# Altium PCB PCB_v4.PcbDoc
Units mm, origin at the board's own origin, x right, y up, seen from the top; angles counter-clockwise.
Board outline 48.97 x 20 mm, 2 copper layers (Top Layer, Bottom Layer); 22 components, 30 nets, 127 pads, 58 vias.
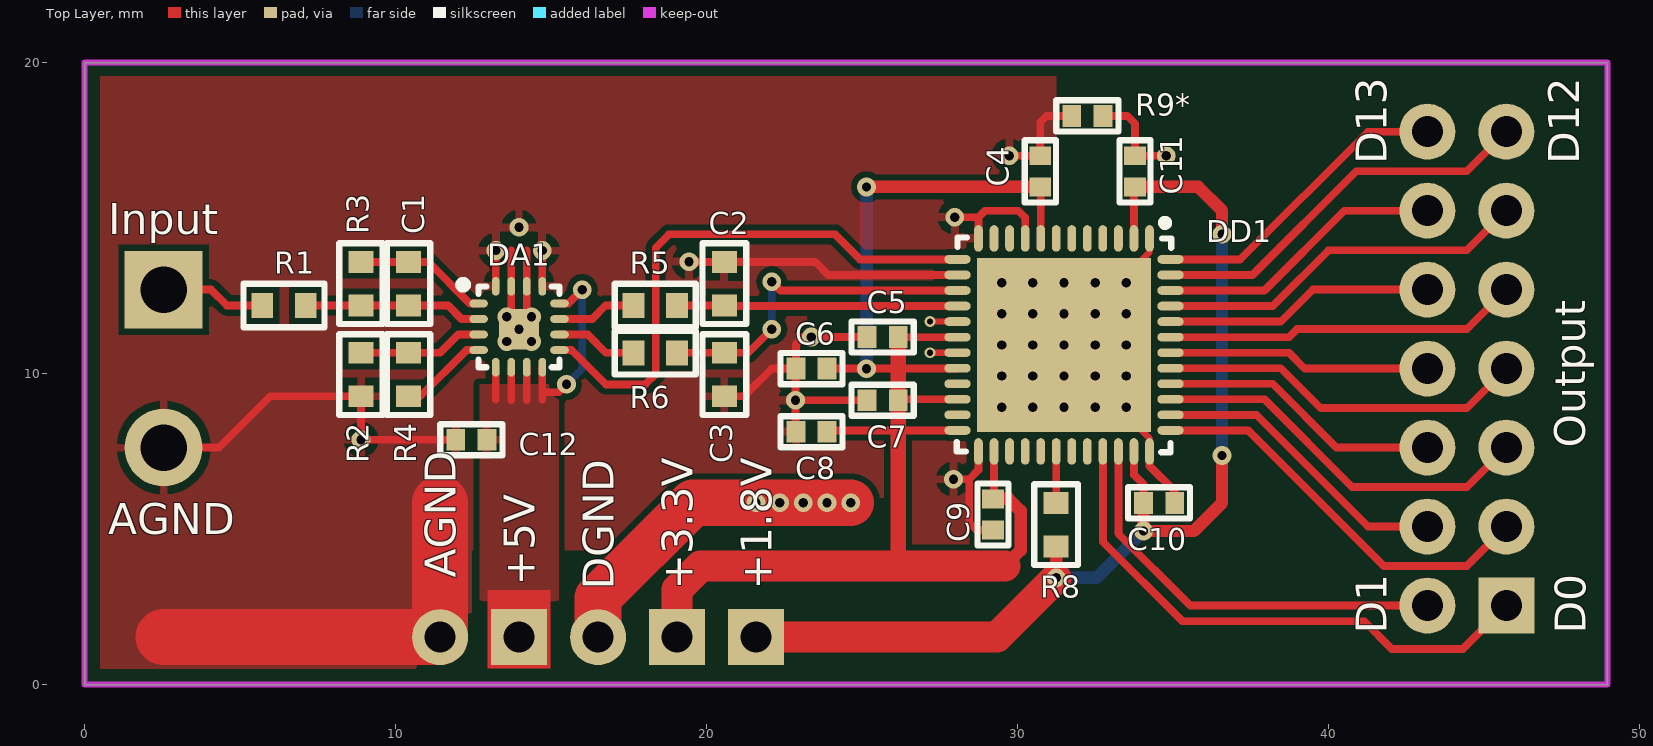
[diagram p0: Top Layer view]
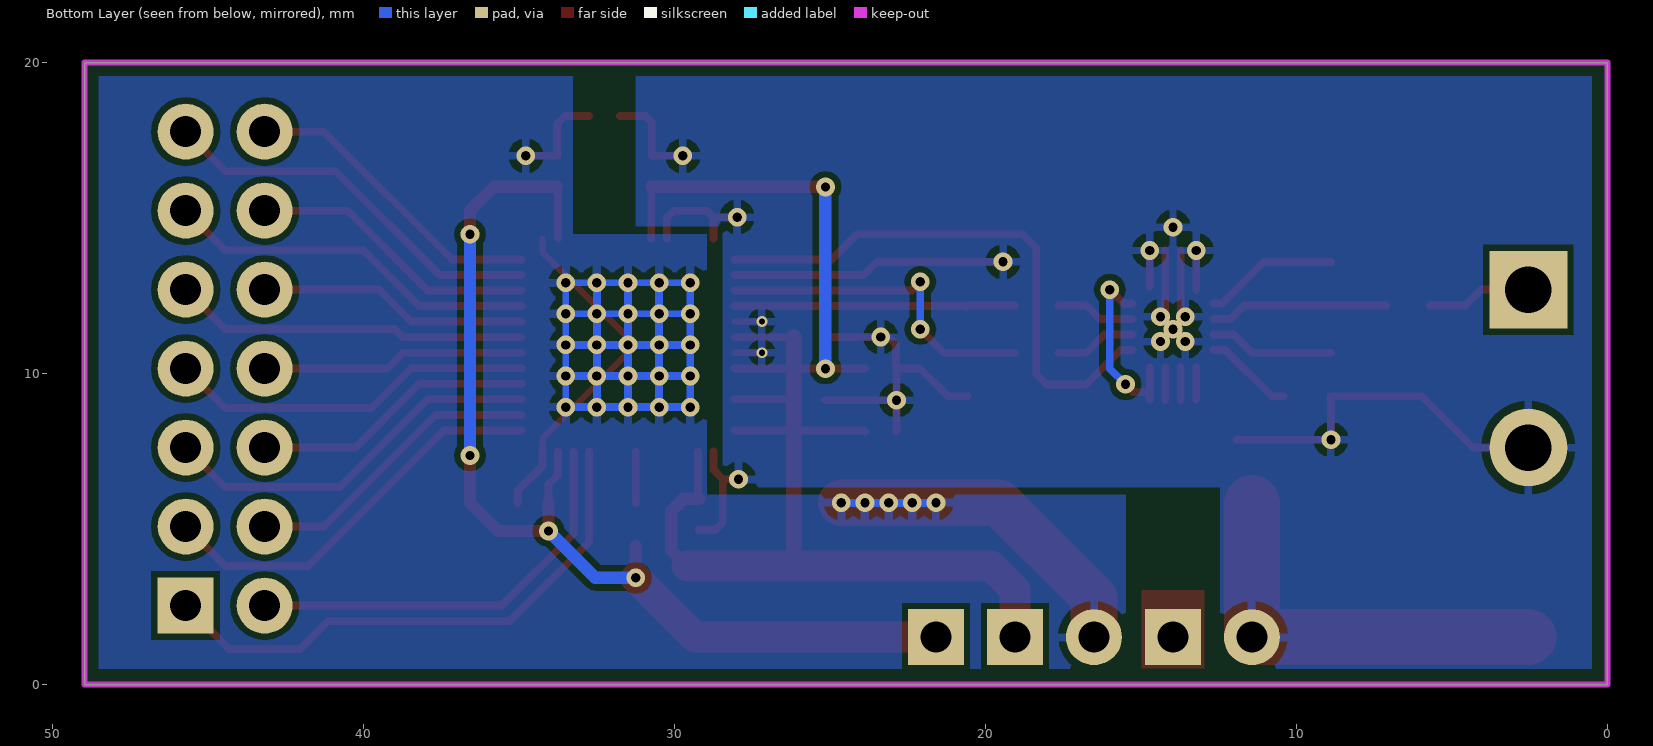
[diagram p1: Bottom Layer view, seen from below]

## Layer stack, top to bottom
Top Solder: solder mask 0.0102, Solder Resist, Dk 3.5
Top Layer: signal copper 0.0356
Dielectric 1: dielectric 0.32, FR-4, Dk 4.8
Bottom Layer: signal copper 0.0356
Bottom Solder: solder mask 0.0102, Solder Resist, Dk 3.5

## Board outline
0,0 0,20 48.97,20 48.97,0

## Design rules (kind name [scope] priority, off if disabled: settings)
Clearance [All] p1: gap=0.2 ignorepadtopadclearanceinfootprint=FALSE
ComponentClearance [All] p1 off: gap=0.254 collisioncheckmode=3 verticalgap=0.254 showdistances=FALSE
HoleSize [All] p1 off: absolutevalues=TRUE maxlimit=2.54 minlimit=0.025 maxpercent=80.000 minpercent=20.000
HoleToHoleClearance [All] p1 off: gap=0.254 allowstackedmicrovias=TRUE
LayerPairs [All] p1 off: enforce=TRUE
MinimumSolderMaskSliver [All] p1 off: minsoldermaskwidth=0.254
NetAntennae [All] p1 off: netantennaetolerance=0
PolygonConnect [All] p1: connectstyle=Relief reliefconductorwidth=0.254 reliefentries=4 polygonreliefangle="90 Angle" airgapwidth=0.254
RoutingVias [All] p1: holewidth=0.3 width=0.6 viastyle="Through Hole" minholewidth=0.1 minwidth=0.1 maxholewidth=0.711 maxwidth=1.27
SilkToSilkClearance [All] p1 off: silktosilkclearance=0.254
SilkToSolderMaskClearance [IsPad] p1 off: minsilkscreentomaskgap=0.254 clearancetoexposedcopper=TRUE
SolderMaskExpansion [All] p1: expansion=0.102
Width [All] p1: maxlimit=10 minlimit=0.1 preferedwidth=0.254
22 further rules are at their usual default settings.

## Components (designator, comment, footprint, x,y, rotation, side; value= is the part's Value field where it differs from the comment)
C1 "1 мкФ" RC0603 10.414,12.192 r180 top
C2 "56 пФ" RC0603 20.574,12.192 r180 top
C3 "56 пФ" RC0603 20.574,9.268 r180 top
C4 "0,1 мкФ" RC0402 30.734,16.002 r90 top (schematic designator С4)
C5 "0,1 мкФ" RC0402 26.162,11.176 r180 top
C6 "0,1 мкФ" RC0402 23.876,10.16 r180 top
C7 "0,1 мкФ" RC0402 26.162,9.144 r180 top
C8 "0,1 мкФ" RC0402 23.876,8.128 r180 top
C9 "0,1 мкФ" RC0402 29.21,5.969 r270 top
C10 "0,1 мкФ" RC0402 34.052,5.842 r0 top
C11 "0,1 мкФ" RC0402 33.782,16.002 r90 top
C12 "0,1 мкФ" RC0402 12.938,7.874 r180 top
DA1 "ADA4932-1" QFN16 12.67,12.255 r0 top
DD1 "ADS61B49" QFN48 34.246,14.347 r270 top
R1 "500 Ом" RC0603 5.712,12.192 r90 top
R2 "500 Ом" RC0603 8.89,10.668 r0 top
R3 "1 кОм" RC0603 8.89,12.192 r180 top
R4 "1 кОм" RC0603 10.414,10.668 r0 top
R5 "33" RC0603 17.65,12.192 r90 top
R6 "33" RC0603 17.65,10.668 r90 top
R8 "10 кОм" RC0603 31.242,5.842 r0 top
R9* "0 Ом" RC0402 31.75,18.288 r0 top

## Footprints (in the part's own frame and the unit in brackets; to place one, negate y for a bottom-side part, rotate by r counter-clockwise, add the part's x,y. Pads: shape width x height; smd on the part's side, far side on the other; paste and mask are expansions set on the pad)
QFN16 [mm]
  oval 0.6x0.25 smd mask+0.07: 1(0,0) 2(0,-0.5) 3(0,-1) 4(0,-1.5) 9(2.6,-1.5) 10(2.6,-1) 11(2.6,-0.5) 12(2.6,0)
  oval 0.25x0.6 smd mask+0.07: 5(0.55,-2.05) 6(1.05,-2.05) 7(1.55,-2.05) 8(2.05,-2.05) 13(2.05,0.55) 14(1.55,0.55) 15(1.05,0.55) 16(0.55,0.55)
  rrect50% 1.3x1.3 smd mask+0.07: 17(1.3,-0.825)
  silkscreen extent -0.63,-2.05 2.6,0.73
QFN48 [mm] "Корпус для ADS61B49"
  oval 0.85x0.28 smd mask+0.07: 1(0,0) 2(0,-0.5) 3(0,-1) 4(0,-1.5) 5(0,-2) 6(0,-2.5) 7(0,-3) 8(0,-3.5) 9(0,-4) 10(0,-4.5) 11(0,-5) 12(0,-5.5) 25(6.85,-5.5) 26(6.85,-5) 27(6.85,-4.5) 28(6.85,-4) 29(6.85,-3.5) 30(6.85,-3) 31(6.85,-2.5) 32(6.85,-2) 33(6.85,-1.5) 34(6.85,-1) 35(6.85,-0.5) 36(6.85,0)
  oval 0.28x0.85 smd mask+0.07: 13(0.675,-6.175) 14(1.175,-6.175) 15(1.675,-6.175) 16(2.175,-6.175) 17(2.675,-6.175) 18(3.175,-6.175) 19(3.675,-6.175) 20(4.175,-6.175) 21(4.675,-6.175) 22(5.175,-6.175) 23(5.675,-6.175) 24(6.175,-6.175) 37(6.175,0.675) 38(5.675,0.675) 39(5.175,0.675) 40(4.675,0.675) 41(4.175,0.675) 42(3.675,0.675) 43(3.175,0.675) 44(2.675,0.675) 45(2.175,0.675) 46(1.675,0.675) 47(1.175,0.675) 48(0.675,0.675)
  rect 5.6x5.6 smd mask+0.07: 49(3.425,-2.75)
  silkscreen extent -0.6,-6.2 6.87,0.7
RC0402 [mm]
  rect 0.6x0.7 smd mask+0.05: 1(0,0) 2(1,0)
  silkscreen extent -0.5,-0.5 1.5,0.5
RC0603 [mm]
  rect 0.8x0.7 smd: 1(0,0) 2(0,-1.4)
  silkscreen extent -0.7,-2 0.7,0.6

## Part data
C1 C2 C3 C4 C5 C6 C7 C8 C9 C10 C11 C12: library part Capacitor, "Конденсатор"
DA1: "Операционный усилитель для АЦП"
DD1: "14-бит АЦП"
R1 R2 R3 R4 R5 R6 R8 R9*: library part Resistor, "Резистор"

## Free pads (board coordinates)
  round 2.5 hole 1.5: 1(2.54,7.62)
  rect 2.5x2.5 hole 1.5: 1(2.54,12.7)
  rect 1.8x1.8 hole 1: 1(13.97,1.524) 1(45.72,2.54) 6(21.59,1.524) 7(19.05,1.524)
  round 1.8 hole 1: 1(16.51,1.524) 6(45.72,5.08) 7(45.72,7.62) 8(11.43,1.524) 8(45.72,10.16) 9(45.72,12.7) 10(45.72,15.24) 11(45.72,17.78) 12(43.18,2.54) 13(43.18,5.08) 14(43.18,7.62) 15(43.18,10.16) 16(43.18,12.7) 17(43.18,15.24) 18(43.18,17.78)

## Via types
v1: diameter 0.6, hole 0.3, Top Layer to Bottom Layer, 56 vias
v2: diameter 0.35, hole 0.2, Top Layer to Bottom Layer, 2 vias

## Nets (pads, with @x,y where several pads share a name; then routed paths per layer and width w, separated by ;. In a path a pad name is that pad's centre, name@x,y a point inside that pad or via, vN(x,y) a via of type N, cw(c..) or ccw(c..) an arc to the next point about the centre after c; other vN are vias at no path point)
+1.8V: C10.1 C11.1 DD1.2 DD1.35 pad.6@21.59,1.524 R8.2 | length 34.7
  Top Layer w0.25: DD1.35 33.746,6.742 34.052,6.436 C10.1 ; DD1.2 33.746,15.966 C11.1
  Top Layer w0.4: v1(31.242,3.429) R8.2 ; C11.1 35.814,16.002 36.576,15.24 v1(36.576,14.478) ; C10.1 v1(34.052,4.937) 35.671,4.937 36.576,5.842 v1(36.576,7.366)
  Top Layer w1: pad.6@21.59,1.524 29.337,1.524 v1(31.242,3.429)
  Bottom Layer w0.4: v1(31.242,3.429) 32.544,3.429 v1(34.052,4.937) ; v1(36.576,7.366) v1(36.576,14.478)
+3.3V: C4.1 C5.1 C6.1 C7.1 C8.1 C9.1 DD1.8 DD1.18 DD1.20 DD1.22 DD1.24 DD1.26 pad.7@19.05,1.524 | length 49.7
  Top Layer w0.25: C8.1 23.92,8.172 26.162,8.172 DD1.24 ; C6.1 v1(25.146,10.16) 26.162,10.16 28.059,10.16 DD1.20 ; C7.1 26.19,9.172 DD1.22 ; C5.1 26.166,11.172 DD1.18 ; C9.1 29.246,6.005 DD1.26 ; C4.1 30.746,15.99 DD1.8
  Top Layer w0.4: v1(25.146,16.002) C4.1 ; C9.1 29.718,5.969 30.099,5.588 30.099,4.318 29.591,3.81
  Top Layer w0.5: 26.162,3.81 26.162,8.172 C7.1 26.162,10.16 C5.1
  Top Layer w1: pad.7@19.05,1.524 19.05,3.048 19.812,3.81 26.162,3.81 29.591,3.81
  Bottom Layer w0.4: v1(25.146,10.16) v1(25.146,16.002)
+5V: C12.1 DA1.5 DA1.6 DA1.7 DA1.8 DA1.12 pad.1@13.97,1.524 | length 9.3
  Top Layer w0.25: 13.22,9.156 DA1.5 ; 13.72,9.148 DA1.6 ; 14.22,9.148 DA1.7 ; 14.72,9.156 DA1.8 ; 14.732,9.398 15.24,9.398 v1(15.494,9.652) ; DA1.12 15.557,12.255 v1(16.002,12.7)
  Bottom Layer w0.25: v1(15.494,9.652) 16.002,10.16 v1(16.002,12.7)
AGND: C2.2 C3.1 C4.2 C5.2 C6.2 C7.2 C8.2 C9.2 C12.2 DA1.13 DA1.14 DA1.15 DA1.16 DA1.17 DD1.9 DD1.12 DD1.14 DD1.17 DD1.19 DD1.25 pad.1@2.54,7.62 pad.8@11.43,1.524 R2.2 R9*.1 | length 63.3
  Top Layer w0.2: v2(27.19,10.672) DD1.19 ; v2(27.19,11.672) DD1.17
  Top Layer w0.25: pad.1@2.54,7.62 4.318,7.62 5.966,9.268 R2.2 v1(8.89,7.874) C12.2 ; DA1.16@13.22,12.688 DA1.16 v1(13.22,13.958) ; 13.716,12.192 13.72,12.192 ; 13.72,13.966 DA1.15 13.72,12.192 ; v1(13.97,11.43) 13.72,11.68 13.72,12.192 ; DA1.17@14.22,11.938 DA1.14 14.22,13.966 ; DA1.13 v1(14.72,13.958) ; v1(19.434,13.592) C2.2 23.492,13.592 23.912,13.172 DD1.14 ; C3.1 21.206,9.268 22.098,10.16 C6.2 ; C8.2 22.86,8.144 v1(22.86,9.144) ; C7.2 v1(22.86,9.144) ; C5.2 v1(23.368,11.176) 23.114,11.176 22.876,10.938 C6.2 ; v1(27.94,6.604) 28.448,6.604 ; v1(27.984,15.03) 28.746,15.03 ; DD1.25 28.746,6.902 28.448,6.604 ; DD1.12 28.746,15.03 ; C9.2 28.686,4.969 28.448,5.207 28.448,6.604 ; v1(29.734,17.002) C4.2 30.734,18.085 30.937,18.288 R9*.1 ; DD1.9 30.246,15.017 30.023,15.24 28.956,15.24 28.746,15.03 ; v1(22.86,9.144) 22.86,10.144 C6.2
  Top Layer w1.8: 2.54,1.524 11.43,1.524 11.43,5.842
  other v1: 13.57,11.03 14.37,11.03 13.57,11.83 14.37,11.83 13.97,14.708
D0: DD1.33 pad.1@45.72,2.54 | length 17.9
  Top Layer w0.25: DD1.33 32.746,4.592 35.306,2.032 41.148,2.032 42.037,1.143 44.323,1.143 pad.1@45.72,2.54
D1: DD1.34 pad.12 | length 13.5
  Top Layer w0.25: DD1.34 33.246,4.854 35.56,2.54 pad.12
D2: DD1.37 pad.6@45.72,5.08 | length 13.1
  Top Layer w0.25: DD1.37 37.421,8.172 41.783,3.81 44.45,3.81 pad.6@45.72,5.08
D3: DD1.38 pad.13 | length 9.7
  Top Layer w0.25: DD1.38 37.683,8.672 41.275,5.08 pad.13
D4: DD1.39 pad.7@45.72,7.62 | length 12.5
  Top Layer w0.25: DD1.39 37.945,9.172 40.767,6.35 44.45,6.35 pad.7@45.72,7.62
D5: DD1.40 pad.14 | length 9.1
  Top Layer w0.25: DD1.40 38.207,9.672 40.259,7.62 pad.14
D6: DD1.41 pad.8@45.72,10.16 | length 11.9
  Top Layer w0.25: DD1.41 38.469,10.172 39.751,8.89 44.45,8.89 pad.8@45.72,10.16
D7: DD1.42 pad.15 | length 8.5
  Top Layer w0.25: DD1.42 38.731,10.672 39.243,10.16 pad.15
D8: DD1.43 pad.9 | length 11.4
  Top Layer w0.25: DD1.43 38.731,11.172 38.989,11.43 44.45,11.43 pad.9
D9: DD1.44 pad.16 | length 8.7
  Top Layer w0.25: DD1.44 38.469,11.672 39.497,12.7 pad.16
D10: DD1.45 pad.10 | length 12.1
  Top Layer w0.25: DD1.45 38.207,12.172 40.005,13.97 44.45,13.97 pad.10
D11: DD1.46 pad.17 | length 9.3
  Top Layer w0.25: DD1.46 37.945,12.672 40.513,15.24 pad.17
D12: DD1.47 pad.11 | length 12.7
  Top Layer w0.25: DD1.47 37.556,13.172 40.894,16.51 44.45,16.51 pad.11
D13: DD1.48 pad.18 | length 10
  Top Layer w0.25: DD1.48 37.167,13.672 41.275,17.78 pad.18
DGND: C10.2 C11.2 DD1.1 DD1.36 DD1.49 pad.1@16.51,1.524 R9*.2 | length 68.1
  Top Layer w0.2: DD1.36 34.246,7.918 33.496,8.668 v1(33.496,8.922) 33.242,8.922 31.496,10.668 v1(31.496,10.922) 31.496,11.151 34.246,13.901 DD1.1
  Top Layer w0.25: R9*.2 33.528,18.288 33.782,18.034 C11.2 v1(34.782,17.002) ; DD1.36 34.246,7.029 35.052,6.223 C10.2
  Top Layer w1.5: pad.1@16.51,1.524 16.51,2.794 19.558,5.842 v1(21.59,5.842) v1(22.352,5.842) v1(23.114,5.842) v1(23.876,5.842) v1(24.638,5.842)
  Bottom Layer w0.2: v1(29.496,11.922) v1(30.496,11.922) v1(31.496,11.922) v1(32.496,11.922) v1(33.496,11.922) ; v1(29.496,12.922) v1(30.496,12.922) v1(31.496,12.922) v1(32.496,12.922) v1(33.496,12.922) v1(33.496,11.922) ; v1(33.496,8.922) v1(33.496,9.922) v1(33.496,10.922) v1(33.496,11.922)
  Bottom Layer w0.25: v1(21.59,5.842) v1(22.352,5.842) v1(23.114,5.842) v1(23.876,5.842) v1(24.638,5.842) ; v1(29.496,12.922) v1(29.496,11.922) v1(29.496,10.922) ; v1(30.496,12.922) v1(30.496,11.922) v1(30.496,10.922) ; v1(31.496,12.922) v1(31.496,11.922) v1(31.496,10.922) ; v1(32.496,12.922) v1(32.496,11.922) v1(32.496,10.922) ; v1(33.496,8.922) v1(32.496,8.922) ; v1(33.496,9.922) v1(32.496,9.922) ; v1(33.496,10.922) v1(32.496,10.922) ; v1(29.496,9.922) v1(30.496,9.922) ; v1(29.496,9.922) v1(29.496,10.922) ; v1(29.496,9.922) v1(29.496,8.922) v1(30.496,8.922) ; v1(29.496,10.922) v1(30.496,10.922) ; v1(30.496,8.922) v1(31.496,8.922) ; v1(30.496,8.922) v1(30.496,9.922) ; v1(30.496,9.922) v1(31.496,9.922) ; v1(30.496,9.922) v1(30.496,10.922) ; v1(30.496,10.922) v1(31.496,10.922) ; v1(31.496,8.922) v1(32.496,8.922) ; v1(31.496,8.922) v1(31.496,9.922) ; v1(31.496,9.922) v1(32.496,9.922) ; v1(31.496,9.922) v1(31.496,10.922) ; v1(31.496,10.922) v1(32.496,10.922) ; v1(32.496,8.922) v1(32.496,9.922) ; v1(32.496,9.922) v1(32.496,10.922)
Input: pad.1@2.54,12.7 R1.1 | length 3.8
  Top Layer w0.25: pad.1@2.54,12.7 4.064,12.7 4.572,12.192 R1.1
  Top Layer w0.8: pad.1@2.54,12.7 pad.1@2.856,12.384
NetC1_1: C1.1 DA1.2 R1.2 R3.1 | length 5.7
  Top Layer w0.25: R1.2 R3.1 C1.1 11.684,12.192 12.121,11.755 DA1.2
NetC1_2: C1.2 DA1.1 R3.2 | length 4.3
  Top Layer w0.25: R3.2 C1.2 11.046,13.592 12.383,12.255 DA1.1
NetC2_1: C2.1 DD1.16 R5.2 | length 9.1
  Top Layer w0.25: R5.2 C2.1 20.625,12.141 20.656,12.172 DD1.16
NetC3_2: C3.2 DD1.15 R6.2 | length 11
  Top Layer w0.25: R6.2 C3.2 21.336,10.668 v1(22.098,11.43) ; v1(22.098,12.954) 22.38,12.672 DD1.15
  Bottom Layer w0.25: v1(22.098,11.43) v1(22.098,12.954)
NetDA1_3: DA1.3 R2.1 R4.1 | length 4
  Top Layer w0.25: R2.1 R4.1 11.43,10.668 12.017,11.255 DA1.3
NetDA1_4: DA1.4 R4.2 | length 2.9
  Top Layer w0.25: R4.2 10.792,9.268 12.279,10.755 DA1.4
NetDA1_9: DA1.9 DD1.13 | length 18
  Top Layer w0.25: DA1.9 15.661,10.755 16.764,9.652 18.034,9.652 18.364,9.982 18.364,14.046 18.796,14.478 24.13,14.478 24.936,13.672 DD1.13
NetDA1_10: DA1.10 R6.1 | length 2.6
  Top Layer w0.25: DA1.10 16.177,11.255 16.764,10.668 R6.1
NetDA1_11: DA1.11 R5.1 | length 2.6
  Top Layer w0.25: DA1.11 16.327,11.755 16.764,12.192 R5.1
NetDD1_30: DD1.30 R8.1 | length 1.7
  Top Layer w0.25: R8.1 31.246,5.846 DD1.30
pads on no net: DD1.3 DD1.4 DD1.5 DD1.6 DD1.7 DD1.10 DD1.11 DD1.21 DD1.23 DD1.27 DD1.28 DD1.29 DD1.31 DD1.32

## Polygon pours and split planes (outlines as drawn)
AGND on Top Layer "Top Layer-No Net" (solid, remove dead copper, pour order 2): 12.446,0.508 0.508,0.508 0.508,19.558 31.242,19.558 31.242,14.732 28.448,14.732 28.448,4.318 12.446,4.318
+5V on Top Layer "Top Layer-No Net" (solid, pour order 0): 12.7,9.652 15.24,9.652 15.24,0.508 12.7,0.508
DGND on Bottom Layer "Top Layer-No Net" (solid, remove dead copper, pour order 6): 15.494,0.508 15.494,6.096 28.956,6.096 28.956,14.478 33.274,14.478 33.274,19.558 48.514,19.558 48.514,0.508
AGND on Bottom Layer "Top Layer-No Net" (solid, remove dead copper, pour order 4): 12.446,0.508 0.508,0.508 0.508,19.558 31.242,19.558 31.242,14.732 28.448,14.732 28.448,6.35 12.446,6.35

## Keep-outs
Keep-Out Layer:
  the board outline again, w0.2

## Other copper
Top Layer:
  rectangle net +5V: 12.954,0.508 14.986,3.048

## Silkscreen, mask and mechanical layers (free items; w line width, h text height)
Top Overlay:
  text "D13" at 41.87,16.73 h1 r90
  text "D12" at 48.07,16.73 h1 r90
  text "Input" at 0.762,14.478 h1
  text "Output" at 48.26,7.62 h1 r90
  text "AGND" at 0.762,4.826 h1
  text "AGND" at 11.938,3.429 h1 r90
  text "+5V" at 14.478,3.175 h1 r90
  text "DGND" at 17.018,3.048 h1 r90
  text "+3.3V" at 19.558,3.048 h1 r90
  text "+1.8V" at 22.098,3.048 h1 r90
  text "D1" at 41.87,1.63 h1 r90
  text "D0" at 48.27,1.63 h1 r90

## Dimensions
0,21 to 48.97,20.43 on Mechanical 1
-1,20 to -1,0 on Mechanical 1